# EAGLE board Keyboard (EAGLE 9.2.0)
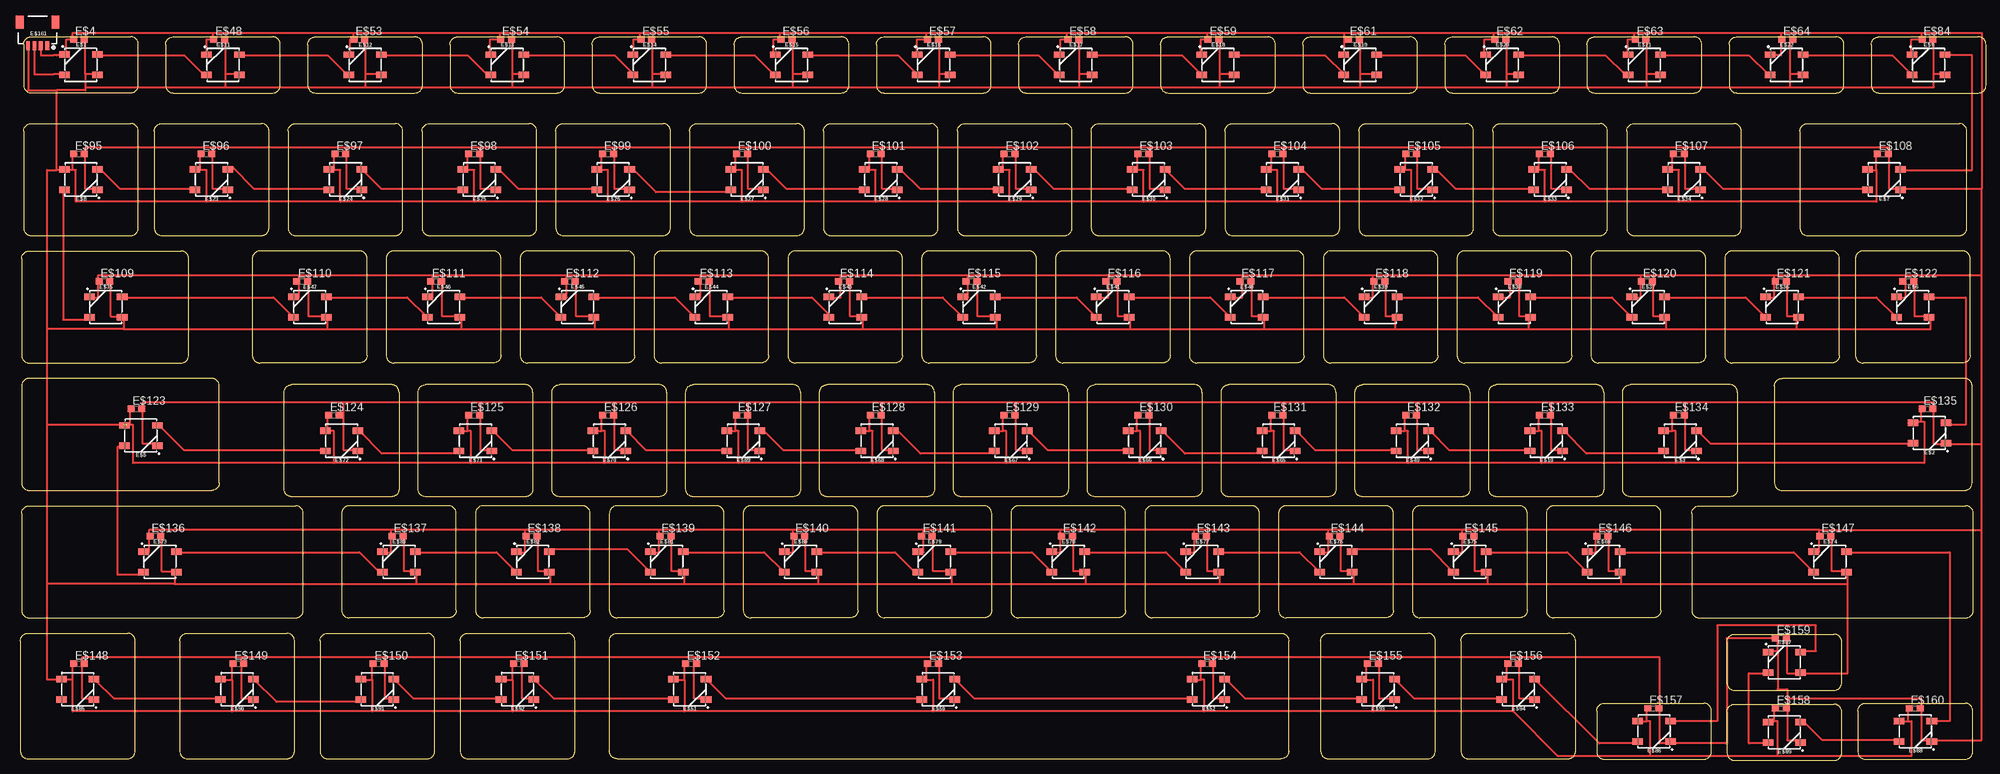
[diagram p0: board, top side]

No outline drawn. Coordinates in mm, seen from the top.
Copper layers (1*16): Top 0.035mm / dielectric 1.5mm / Bottom 0.035mm
Design rules "default": minimum track width 10mil, minimum drill 24mil, track to track 8mil, track to pad 8mil, pad to pad 8mil, via to via 8mil, smd to smd 8mil, copper to edge 40mil, drill to drill 8mil, minimum pad ring 10mil, minimum via ring 8mil, stop-mask expansion 4mil, vias tented up to drill 0mil, thermal gap 10mil
Milling: 677 lines

## Footprints (pad centres in the part's own frame; a part is rotated, then mirrored left to right if it is on the bottom)
WS2812B = smd 1.651 x 1: 1 2.577,-1.6; 2 2.577,1.6; 3 -2.577,1.6; 4 -2.577,-1.6
C0603 = smd 1.1 x 1: 1 -0.85,0; 2 0.85,0
1X04_1MM_RA = smd 0.6 x 1.35: 1 -1.5,0; 2 -0.5,0; 3 0.5,0; 4 1.5,0 | smd 1.2 x 2: NC1 2.8,-3.675; NC2 -2.8,-3.675

## Placement (x,y rotation side)
E$1  [WS2812B]  12.3,112 0 top
E$2  [WS2812B]  302.3,54.2 180 top
E$3  [WS2812B]  263.2,53 180 top
E$4  [C0603]  12,116 0 top
E$5  [WS2812B]  21.7,53.8 180 top
E$6  [WS2812B]  299.7,74 0 top
E$7  [WS2812B]  295.2,94 180 top
E$8  [WS2812B]  12.3,94 180 top
E$9  [WS2812B]  302.19,111.98 0 top
E$10  [WS2812B]  242.2,53 180 top
E$11  [WS2812B]  34.59,111.98 0 top
E$12  [WS2812B]  56.89,111.98 0 top
E$13  [WS2812B]  79.19,111.98 0 top
E$14  [WS2812B]  101.49,111.98 0 top
E$15  [WS2812B]  123.79,111.98 0 top
E$16  [WS2812B]  146.09,111.98 0 top
E$17  [WS2812B]  168.39,111.98 0 top
E$18  [WS2812B]  190.69,111.98 0 top
E$19  [WS2812B]  212.99,111.98 0 top
E$20  [WS2812B]  235.29,111.98 0 top
E$21  [WS2812B]  257.59,111.98 0 top
E$22  [WS2812B]  279.89,111.98 0 top
E$23  [WS2812B]  32.8,94 180 top
E$24  [WS2812B]  53.8,94 180 top
E$25  [WS2812B]  74.8,94 180 top
E$26  [WS2812B]  95.8,94 180 top
E$27  [WS2812B]  116.8,94 180 top
E$28  [WS2812B]  137.8,94 180 top
E$29  [WS2812B]  158.8,94 180 top
E$30  [WS2812B]  179.8,94 180 top
E$31  [WS2812B]  200.8,94 180 top
E$32  [WS2812B]  221.8,94 180 top
E$33  [WS2812B]  242.8,94 180 top
E$34  [WS2812B]  263.8,94 180 top
E$35  [WS2812B]  16.2,74 0 top
E$36  [WS2812B]  279.2,74 0 top
E$37  [WS2812B]  258.2,74 0 top
E$38  [WS2812B]  237.2,74 0 top
E$39  [WS2812B]  216.2,74 0 top
E$40  [WS2812B]  195.2,74 0 top
E$41  [WS2812B]  174.2,74 0 top
E$42  [WS2812B]  153.2,74 0 top
E$43  [WS2812B]  132.2,74 0 top
E$44  [WS2812B]  111.2,74 0 top
E$45  [WS2812B]  90.2,74 0 top
E$46  [WS2812B]  69.2,74 0 top
E$47  [WS2812B]  48.2,74 0 top
E$48  [C0603]  34,116 0 top
E$49  [WS2812B]  221.2,53 180 top
E$50  [WS2812B]  146.8,14 180 top
E$51  [WS2812B]  107.8,14 180 top
E$52  [WS2812B]  189.2,14 180 top
E$53  [C0603]  56,116 0 top
E$54  [C0603]  79,116 0 top
E$55  [C0603]  101,116 0 top
E$56  [C0603]  123,116 0 top
E$57  [C0603]  146,116 0 top
E$58  [C0603]  168,116 0 top
E$59  [C0603]  190,116 0 top
E$60  [WS2812B]  251.2,34 0 top
E$61  [C0603]  212,116 0 top
E$62  [C0603]  235,116 0 top
E$63  [C0603]  257,116 0 top
E$64  [C0603]  280,116 0 top
E$65  [WS2812B]  200.2,53 180 top
E$66  [WS2812B]  179.2,53 180 top
E$67  [WS2812B]  158.2,53 180 top
E$68  [WS2812B]  137.2,53 180 top
E$69  [WS2812B]  116.2,53 180 top
E$70  [WS2812B]  95.2,53 180 top
E$71  [WS2812B]  74.2,53 180 top
E$72  [WS2812B]  53.2,53 180 top
E$73  [WS2812B]  24.7,34 0 top
E$74  [WS2812B]  286.7,34 0 top
E$75  [WS2812B]  230.2,34 0 top
E$76  [WS2812B]  209.2,34 0 top
E$77  [WS2812B]  188.2,34 0 top
E$78  [WS2812B]  167.2,34 0 top
E$79  [WS2812B]  146.2,34 0 top
E$80  [WS2812B]  125.2,34 0 top
E$81  [WS2812B]  104.2,34 0 top
E$82  [WS2812B]  83.2,34 0 top
E$83  [WS2812B]  62.2,34 0 top
E$84  [C0603]  302,116 0 top
E$85  [WS2812B]  11.8,14 180 top
E$86  [WS2812B]  259.1,7.4 180 top
E$87  [WS2812B]  279.55,18.24 0 top
E$88  [WS2812B]  300.1,7.4 180 top
E$89  [WS2812B]  279.55,7.24 180 top
E$90  [WS2812B]  36.8,14 180 top
E$91  [WS2812B]  58.8,14 180 top
E$92  [WS2812B]  80.8,14 180 top
E$93  [WS2812B]  215.8,14 180 top
E$94  [WS2812B]  237.8,14 180 top
E$95  [C0603]  12,98 0 top
E$96  [C0603]  32,98 0 top
E$97  [C0603]  53,98 0 top
E$98  [C0603]  74,98 0 top
E$99  [C0603]  95,98 0 top
E$100  [C0603]  116,98 0 top
E$101  [C0603]  137,98 0 top
E$102  [C0603]  158,98 0 top
E$103  [C0603]  179,98 0 top
E$104  [C0603]  200,98 0 top
E$105  [C0603]  221,98 0 top
E$106  [C0603]  242,98 0 top
E$107  [C0603]  263,98 0 top
E$108  [C0603]  295,98 0 top
E$109  [C0603]  16,78 0 top
E$110  [C0603]  47,78 0 top
E$111  [C0603]  68,78 0 top
E$112  [C0603]  89,78 0 top
E$113  [C0603]  110,78 0 top
E$114  [C0603]  132,78 0 top
E$115  [C0603]  152,78 0 top
E$116  [C0603]  174,78 0 top
E$117  [C0603]  195,78 0 top
E$118  [C0603]  216,78 0 top
E$119  [C0603]  237,78 0 top
E$120  [C0603]  258,78 0 top
E$121  [C0603]  279,78 0 top
E$122  [C0603]  299,78 0 top
E$123  [C0603]  21,58 0 top
E$124  [C0603]  52,57 0 top
E$125  [C0603]  74,57 0 top
E$126  [C0603]  95,57 0 top
E$127  [C0603]  116,57 0 top
E$128  [C0603]  137,57 0 top
E$129  [C0603]  158,57 0 top
E$130  [C0603]  179,57 0 top
E$131  [C0603]  200,57 0 top
E$132  [C0603]  221,57 0 top
E$133  [C0603]  242,57 0 top
E$134  [C0603]  263,57 0 top
E$135  [C0603]  302,58 0 top
E$136  [C0603]  24,38 0 top
E$137  [C0603]  62,38 0 top
E$138  [C0603]  83,38 0 top
E$139  [C0603]  104,38 0 top
E$140  [C0603]  125,38 0 top
E$141  [C0603]  145,38 0 top
E$142  [C0603]  167,38 0 top
E$143  [C0603]  188,38 0 top
E$144  [C0603]  209,38 0 top
E$145  [C0603]  230,38 0 top
E$146  [C0603]  251,38 0 top
E$147  [C0603]  286,38 0 top
E$148  [C0603]  12,18 0 top
E$149  [C0603]  37,18 0 top
E$150  [C0603]  59,18 0 top
E$151  [C0603]  81,18 0 top
E$152  [C0603]  108,18 0 top
E$153  [C0603]  146,18 0 top
E$154  [C0603]  189,18 0 top
E$155  [C0603]  215,18 0 top
E$156  [C0603]  237,18 0 top
E$157  [C0603]  259,11 0 top
E$158  [C0603]  279,11 0 top
E$159  [C0603]  279,22 0 top
E$160  [C0603]  300,11 0 top
E$161  [1X04_1MM_RA]  5.5,115 180 top

## Library data of the parts
E$1-E$3 E$5-E$47 E$49-E$52 E$60 E$65-E$83 E$85-E$94 = SparkFun-LED
E$4 E$48 E$53-E$59 E$61-E$64 E$84 E$95-E$160 = eagle-ltspice
E$161 = SparkFun-Connectors

## Nets
S$236: E$161.3
VDD: E$161.4
VSS: E$161.2

## Tracks (layer width: path | path; a pad name or v marks a point on that pad's centre or on a via)
S$1
  Top 0.305: 15,113.5 28.5,113.5 31.5,110.5
S$2
  Top 0.305: 37.5,113.5 51,113.5 54,110.5
S$3
  Top 0.305: 60,113.5 73,113.5 76.5,110
S$4
  Top 0.305: 82,113.5 96,113.5 99,110.5
S$5
  Top 0.305: 104,113.5 118,113.5 121,110.5
S$6
  Top 0.305: 126.5,113.5 140.5,113.5 143.5,110.5
S$7
  Top 0.305: 148.5,113.5 162.5,113.5 165.5,110.5
S$8
  Top 0.305: 171,113.5 185,113.5 188,110.5
S$9
  Top 0.305: 193,113.5 207.5,113.5 210.5,110.5
S$10
  Top 0.305: 215.5,113.5 229.5,113.5 232.5,110.5
S$11
  Top 0.305: 238,113.5 251.5,113.5 254.5,110.5
S$12
  Top 0.305: 260,113.5 274,113.5 277,110.5
S$13
  Top 0.305: 282.5,113.5 296.5,113.5 299.5,110.5
S$14
  Top 0.305: 298,95.5 309,95.5 309,113.5 305,113.5
S$15
  Top 0.305: 292.5,92.5 270,92.5 267,95.5
S$16
  Top 0.305: 261.5,92.5 249,92.5 246,95.5
S$17
  Top 0.305: 240,92.5 228,92.5 225,95.5
S$18
  Top 0.305: 219,92.5 207,92.5 204,95.5
S$19
  Top 0.305: 198.5,92.5 185.5,92.5 182.5,95.5
S$20
  Top 0.305: 177.5,92.5 165,92.5 162,95.5
S$21
  Top 0.305: 156,92.5 144,92.5 141,95.5
S$22
  Top 0.305: 135,92.5 123,92.5 119.5,96
S$23
  Top 0.305: 114,92 102.5,92 98.5,96
S$24
  Top 0.305: 93,92.5 81,92.5 78,95.5
S$25
  Top 0.305: 72,92.5 59.5,92.5 56.5,95.5
S$26
  Top 0.305: 51.5,92.5 39.5,92.5 36,96
S$27
  Top 0.305: 30,92.5 18.5,92.5 15.5,95.5
S$28
  Top 0.305: 9.5,92.5 9.5,72 13.5,72
S$29
  Top 0.305: 19,75.5 42.5,75.5 45.5,72.5
S$30
  Top 0.305: 51,75.5 63.5,75.5 66.5,72.5
S$31
  Top 0.305: 71.5,75.5 84.5,75.5 87.5,72.5
S$32
  Top 0.305: 93,75.5 105.5,75.5 108.5,72.5
S$33
  Top 0.305: 114,75.5 127,75.5 130,72.5
S$34
  Top 0.305: 135,75.5 147.5,75.5 150.5,72.5
S$35
  Top 0.305: 155.5,75.5 168.5,75.5 171.5,72.5
S$36
  Top 0.305: 176.5,75.5 189.5,75.5 192.5,72.5
S$37
  Top 0.305: 197.5,75.5 210.5,75.5 213.5,72.5
S$38
  Top 0.305: 219,75.5 231.5,75.5 234.5,72.5
S$39
  Top 0.305: 240,75.5 252.5,75.5 255.5,72.5
S$40
  Top 0.305: 261,75.5 273.5,75.5 276.5,72.5
S$41
  Top 0.305: 282,75.5 294,75.5 297,72.5
S$42
  Top 0.305: 302.5,75.5 308,75.5 308,55.5 305,55.5
S$43
  Top 0.305: 299.5,52.5 268,52.5 266,54.5
S$44
  Top 0.305: 261,51 248.5,51 245,54.5
S$45
  Top 0.305: 239.5,51.5 227,51.5 224,54.5
S$46
  Top 0.305: 218.5,51.5 206,51.5 203,54.5
S$47
  Top 0.305: 198,51 185.5,51 182,54.5
S$48
  Top 0.305: 176.5,51.5 164,51.5 161,54.5
S$49
  Top 0.305: 156,51 144,51 140.5,54.5
S$50
  Top 0.305: 134.5,51.5 122.5,51.5 119.5,54.5
S$51
  Top 0.305: 113.5,51.5 101,51.5 98,54.5
S$52
  Top 0.305: 92.5,51.5 80,51.5 77,54.5
S$53
  Top 0.305: 71.5,51 59.5,51 56,54.5
S$54
  Top 0.305: 50.5,51.5 28.5,51.5 24.5,55.5
S$55
  Top 0.305: 19,52 18,52 18,32 22.5,32
S$56
  Top 0.305: 27.5,35.5 56,35.5 59,32.5
S$57
  Top 0.305: 65,35.5 77.5,35.5 80.5,32.5
S$58
  Top 0.305: 86,36 98,36 101.5,32.5
S$59
  Top 0.305: 107,35.5 119.5,35.5 122.5,32.5
S$60
  Top 0.305: 128,35.5 140,35.5 143.5,32
S$61
  Top 0.305: 149,35.5 161.5,35.5 164.5,32.5
S$62
  Top 0.305: 170,35.5 182.5,35.5 185.5,32.5
S$63
  Top 0.305: 190.5,35.5 203.5,35.5 206.5,32.5
S$64
  Top 0.305: 212,36 224,36 227.5,32.5
S$65
  Top 0.305: 232.5,35.5 245.5,35.5 248.5,32.5
S$66
  Top 0.305: 254,35.5 281,35.5 284,32.5
S$67
  Top 0.305: 289.5,35.5 305.5,35.5 305.5,9 303,9
S$68
  Top 0.305: 297.5,6 285.5,6 282.5,9
S$69
  Top 0.305: 277,5.5 274,5.5 274,16.5 277,16.5
S$70
  Top 0.305: 282,20 284.5,20 284.5,24 269,24 269,9 262,9
S$71
  Top 0.305: 256.5,5.5 250.5,5.5 240.5,15.5
S$72
  Top 0.305: 235.5,12.5 221.5,12.5 218.5,15.5
S$73
  Top 0.305: 213,12.5 195,12.5 192,15.5
S$74
  Top 0.305: 186.5,12.5 152.5,12.5 149.5,15.5
S$75
  Top 0.305: 144,12.5 113.5,12.5 110.5,15.5
S$76
  Top 0.305: 105,12.5 86.5,12.5 83.5,15.5
S$77
  Top 0.305: 78.5,12.5 64.5,12.5 61.5,15.5
S$78
  Top 0.305: 56,12 43,12 39.5,15.5
S$79
  Top 0.305: 34.5,12.5 17.5,12.5 14.5,15.5
S$236
  Top 0.305: 10,110.5 9,110.5 8,110.5 5,110.5 E$161.3
VDD  (1 unrouted)
  Top 0.305: 213.5,15.5 214,15.5 | 214,15.5 214,18 | 214,15.5 215,15.5 215,10.5 | 186.5,15.5 188,15.5 | 188,15.5 188,18.5 | 188,15.5 188.5,15.5 188.5,10.5 | 144,15.5 145,15.5 | 145,15.5 145,18 | 145,15.5 146,15.5 146,10.5 | 105.5,15.5 107,15.5 | 107,15.5 107,18 | 78,15.5 80,15.5 | 80,15.5 80,18 | 56,15.5 58,15.5 | 58,15.5 58,18 | 34,15.5 36,15.5 | 36,15.5 36,18 | 297.5,9 299,9 | 299,9 299,11 | 299,9 299.5,9 299.5,3.5 278.5,3.5 | 277,9 278,9 | 278,9 278,11 | 278,9 278.5,9 278.5,3.5 | 256.5,9 258,9 | 258,9 258,11 | 258,9 258.5,9 258.5,3.5 | 278.5,3.5 258.5,3.5 | 235,15.5 236,15.5 | 236,15.5 236,18 | 236,15.5 237,15.5 237,10.5 | 258.5,3.5 244,3.5 237,10.5 | 11,15.5 11,18 | 11,15.5 11,10.5 36,10.5 | 280,22 280,16.5 289.5,16.5 289.5,30.5 | 25,38 25,32.5 27,32.5 27,30.5 | 63,38 63,32.5 65,32.5 65,30.5 | 27,30.5 65,30.5 | 84,38 84,32.5 86,32.5 86,30.5 | 65,30.5 86,30.5 | 105,38 105,32.5 107,32.5 107,30.5 | 86,30.5 107,30.5 | 126,38 126,32.5 128,32.5 128,30.5 | 107,30.5 128,30.5 | 146,38 146,32.5 149,32.5 149,30.5 | 128,30.5 149,30.5 | 168,38 168,32.5 170,32.5 170,30.5 | 149,30.5 170,30.5 | 189,38 189,32.5 191,32.5 191,30.5 | 170,30.5 191,30.5 | 210,38 210,32.5 212,32.5 212,30.5 | 191,30.5 212,30.5 | 231,38 231,32.5 233,32.5 233,30.5 | 212,30.5 233,30.5 | 252,38 252,32.5 254,32.5 254,30.5 | 233,30.5 254,30.5 | 287,38 287,32.5 289.5,32.5 289.5,30.5 | 254,30.5 289.5,30.5 | 300,56 301,56 | 301,56 301,58 | 301,56 301.5,56 301.5,49.5 262.5,49.5 | 262.5,49.5 262.5,54.5 262,54.5 | 260.5,54.5 262,54.5 | 262,54.5 262,57 | 262.5,49.5 241.5,49.5 | 241.5,49.5 241.5,54.5 241,54.5 | 239.5,54.5 241,54.5 | 241,54.5 241,57 | 241.5,49.5 220.5,49.5 | 220.5,49.5 220.5,54.5 220,54.5 | 218.5,54.5 220,54.5 | 220,54.5 220,57 | 220.5,49.5 199.5,49.5
  Top 0.305: 199.5,49.5 199.5,54.5 199,54.5 | 197.5,54.5 199,54.5 | 199,54.5 199,57 | 199.5,49.5 178.5,49.5 | 178.5,49.5 178.5,54.5 178,54.5 | 176.5,54.5 178,54.5 | 178,54.5 178,57 | 178.5,49.5 157.5,49.5 | 157.5,49.5 157.5,54.5 157,54.5 | 155.5,54.5 157,54.5 | 157,54.5 157,57 | 157.5,49.5 136.5,49.5 | 136.5,49.5 136.5,54.5 136,54.5 | 134.5,54.5 136,54.5 | 136,54.5 136,57 | 136.5,49.5 115.5,49.5 | 115.5,49.5 115.5,54.5 115,54.5 | 113.5,54.5 115,54.5 | 115,54.5 115,57 | 115.5,49.5 94.5,49.5 | 94.5,49.5 94.5,54.5 94,54.5 | 92.5,54.5 94,54.5 | 94,54.5 94,57 | 94.5,49.5 73.5,49.5 | 73.5,49.5 73.5,54.5 73,54.5 | 71.5,54.5 73,54.5 | 73,54.5 73,57 | 73.5,49.5 52,49.5 | 52,49.5 52,54.5 51,54.5 | 50.5,54.5 51,54.5 | 51,54.5 51,57 | 52,49.5 20.5,49.5 20.5,55.5 20,55.5 | 19,55.5 20,55.5 | 20,55.5 20,58 | 17,78 17,72.5 19,72.5 19,70.5 | 19,70.5 51,70.5 | 48,78 48,72.5 51,72.5 51,70.5 | 69,78 69,72.5 72,72.5 72,70.5 | 51,70.5 72,70.5 | 90,78 90,72.5 93,72.5 93,70.5 | 72,70.5 93,70.5 | 111,78 111,72.5 114,72.5 114,70.5 | 93,70.5 114,70.5 | 133,78 133,72.5 135,72.5 135,70.5 | 114,70.5 135,70.5 | 153,78 153,72.5 156,72.5 156,70.5 | 135,70.5 156,70.5 | 175,78 175,72.5 177,72.5 177,70.5 | 156,70.5 177,70.5 | 196,78.5 196,72.5 198,72.5 198,70.5 | 177,70.5 198,70.5 | 217,78 217,72.5 218.5,72.5 218.5,70.5 | 198,70.5 218.5,70.5 | 240,72.5 239.5,72.5 | 239.5,72.5 238,72.5 238,78 | 218.5,70.5 239.5,70.5 | 239.5,70.5 239.5,72.5 | 259,78 259,72.5 261,72.5 261,70.5 | 239.5,70.5 261,70.5 | 280,78 280,72.5 281.5,72.5 281.5,70.5 | 261,70.5 281.5,70.5 | 300,78 300,72.5 302.5,72.5 302.5,70.5 281.5,70.5 | 19,70.5 7,70.5 | 7,70.5 7,95.5 8.5,95.5 | 292.5,95.5 294,95.5 | 294,95.5 294,98 | 294,95.5 294,90.5 263,90.5 | 263,90.5 263,95.5 262,95.5
  Top 0.305: 261,95.5 262,95.5 | 262,95.5 262,98 | 263,90.5 242,90.5 | 242,90.5 242,95.5 241,95.5 | 240.5,95.5 241,95.5 | 241,95.5 241,98 | 242,90.5 221,90.5 | 221,90.5 221,95.5 220,95.5 | 220,98 220,95.5 | 220,95.5 219,95.5 | 221,90.5 200,90.5 | 200,90.5 200,95.5 199,95.5 | 199,98 199,95.5 | 199,95.5 198,95.5 | 200,90.5 179,90.5 | 179,90.5 179,95.5 178,95.5 | 178,98 178,95.5 | 178,95.5 177,95.5 | 179,90.5 158,90.5 | 158,90.5 158,95.5 157,95.5 | 156,95.5 157,95.5 | 157,95.5 157,98 | 158,90.5 137,90.5 | 137,90.5 137,95.5 136,95.5 | 135.5,95.5 136,95.5 | 136,95.5 136,98 | 137,90.5 116,90.5 | 116,90.5 116,95.5 115,95.5 | 114,95.5 115,95.5 | 115,95.5 115,98 | 116,90.5 95,90.5 | 95,90.5 95,95.5 94,95.5 | 93,95.5 94,95.5 | 94,95.5 94,98 | 95,90.5 74,90.5 | 74,90.5 74,95.5 73,95.5 | 72.5,95.5 73,95.5 | 73,95.5 73,98 | 74,90.5 53,90.5 | 53,90.5 53,95.5 52,95.5 | 51,95.5 52,95.5 | 52,95.5 52,98 | 53,90.5 32,90.5 | 32,90.5 32,95.5 31,95.5 | 30,95.5 31,95.5 | 31,95.5 31,98 | 32,90.5 11.5,90.5 11.5,95.5 11,95.5 | 11,95.5 11,98 | 15,110.5 13,110.5 | 13,110.5 13,116 | 13,110.5 13,108.5 | 13,108.5 13,108 8.5,108 | 37.5,110.5 35,110.5 | 35,110.5 35,116 | 13,108.5 35,108.5 | 35,108.5 35,110.5 | 59.5,110.5 57,110.5 | 57,110.5 57,116 | 35,108.5 57,108.5 | 57,108.5 57,110.5 | 82,110.5 80,110.5 | 80,110.5 80,116 | 57,108.5 80,108.5 | 80,108.5 80,110.5 | 104,110.5 102,110.5 | 102,110.5 102,116 | 80,108.5 102,108.5 | 102,108.5 102,110.5 | 126.5,110.5 124,110.5 | 124,110.5 124,116 | 102,108.5 124,108.5 | 124,108.5 124,110.5 | 148.5,110.5 147,110.5 | 147,110.5 147,116 | 124,108.5 147,108.5 | 147,108.5 147,110.5 | 171,110.5 169,110.5 | 169,110.5 169,116 | 147,108.5 169,108.5 | 169,108.5 169,110.5 | 193.5,110.5 191,110.5 | 191,110.5 191,116 | 169,108.5 191,108.5
  Top 0.305: 191,108.5 191,110.5 | 215.5,110.5 213,110.5 | 213,110.5 213,116 | 191,108.5 213,108.5 | 213,108.5 213,110.5 | 238,110.5 236,110.5 | 236,110.5 236,116 | 213,108.5 236,108.5 | 236,108.5 236,110.5 | 260,110.5 258,110.5 | 258,110.5 258,116 | 236,108.5 258,108.5 | 258,108.5 258,110.5 | 282.5,110.5 280.5,110.5 | 280.5,110.5 280.5,116 | 258,108.5 280.5,108.5 | 280.5,108.5 280.5,110.5 | 305,110.5 303,110.5 | 303,110.5 303,115.5 | 280.5,108.5 303,108.5 303,110.5 | 11,95.5 8.5,95.5 | 8.5,95.5 8.5,108 | 19.5,55.5 7,55.5 | 7,55.5 7,70.5 | 27,30.5 7,30.5 | 7,30.5 7,55.5 | 11,15.5 7,15.5 7,30.5 | E$161.4 4,108 8.5,108 | 237,10.5 215,10.5 | 215,10.5 188.5,10.5 | 188.5,10.5 146,10.5 | 146,10.5 107,10.5 | 107,10.5 80,10.5 | 80,10.5 58,10.5 | 58,10.5 36,10.5 | 36,15.5 36,10.5 | 58,15.5 58,10.5 | 80,15.5 80,10.5 | 107,15.5 107,10.5
VSS
  Top 0.305: 240,12.5 238,12.5 238,19 | 218,12.5 216,12.5 216,19 | 192,12.5 190,12.5 190,19 | 149,12.5 147,12.5 147,19 | 110.5,12.5 108.5,12.5 108.5,19 | 83.5,12.5 81.5,12.5 81.5,19 | 62,12.5 60,12.5 60,19 | 39.5,12.5 37.5,12.5 37.5,19 | 277,20 278.5,20 | 278.5,20 278.5,22 270.5,22 270.5,5.5 260,5.5 260,19 238,19 | 278.5,20 278.5,14 280,14 280,12.5 | 249,35.5 250,35.5 250,39 | 228,35.5 229,35.5 229,39 | 186,35.5 187,35.5 187,39 | 143.5,35.5 144.5,35.5 144.5,39 | 123,35.5 124,35.5 124,39 | 102,35.5 103,35.5 103,39 | 60,35.5 61,35.5 61,39 | 284,35.5 285,35.5 285,39 | 45,75.5 46.5,75.5 46.5,79 | 66,75.5 67.5,75.5 67.5,79 | 87,75.5 88.5,75.5 88.5,79 | 108,75.5 109.5,75.5 109.5,79 | 130,75.5 131.5,75.5 131.5,79 | 150,75.5 151.5,75.5 151.5,79 | 172,75.5 173.5,75.5 173.5,79 | 193,75.5 194.5,75.5 194.5,79 | 213.5,75.5 215,75.5 215,79 | 276.5,75.5 278,75.5 278,79 | 13.5,75.5 15,75.5 15,79 46.5,79 | 297,75.5 298.5,75.5 298.5,79 | 46.5,79 67.5,79 | 67.5,79 88.5,79 | 88.5,79 109.5,79 | 109.5,79 131.5,79 | 131.5,79 151.5,79 | 151.5,79 173.5,79 | 173.5,79 194.5,79 | 194.5,79 215,79 | 215,79 236.5,79 | 236.5,79 257,79 | 257,79 278,79 | 278,79 298.5,79 | 266,92.5 264,92.5 264,99 | 32,113.5 32,116 33,116 33,117 | 33,117 11,117 11,116 10,116 10,113.5 8.5,113.5 8,113.5 6,113.5 E$161.2 | 54.5,113.5 54.5,116 55,116 55,117 | 33,117 55,117 | 76.5,113.5 76.5,116 78,116 78,117 | 55,117 78,117 | 99,113.5 99,116 100,116 100,117 | 78,117 100,117 | 121,113.5 121,116 122,116 122,117 | 100,117 122,117 | 143.5,114 143.5,116 145,116 145,117 | 122,117 145,117 | 166,113.5 166,116 167,116 | 167,116 167.5,116 | 145,117 167,117 | 167,116 167,117 | 167,117 189,117 | 188,113.5 188,116 189,116 189,117 | 210.5,113.5 210.5,116
  Top 0.305: 210.5,116 211,116 | 189,117 210.5,117 | 210.5,116 210.5,117 | 232.5,113.5 232.5,116 234,116 234,117 | 210.5,117 234,117 | 255,113.5 255,116 256,116 | 256,116 256.5,116 | 234,117 256,117 | 256,116 256,117 | 256,117 279,117 | 279,117 279,113.5 277.5,113.5 | 299.5,113.5 299.5,116 301,116 301,117 | 279,117 301,117 | 301,117 310.5,117 310.5,92.5 | 264,99 296,99 296,92.5 310.5,92.5 | 264,99 243,99 | 243,99 222,99 | 222,99 201,99 | 201,99 180,99 | 180,99 159,99 | 159,99 138,99 | 138,99 117,99 | 117,99 96,99 | 96,99 75,99 | 75,99 54,99 | 54,99 33,99 | 33,99 13,99 13,92.5 15,92.5 | 245,92.5 243,92.5 243,99 | 224,92.5 222,92.5 222,99 | 203,92.5 201,92.5 201,99 | 182,92.5 180,92.5 180,99 | 161,92.5 159,92.5 159,99 | 140,92.5 138,92.5 138,99 | 119,92.5 117,92.5 117,99 | 98,92.5 96,92.5 96,99 | 77,92.5 75,92.5 75,99 | 56,92.5 54,92.5 54,99 | 35,92.5 33,92.5 33,99 | 310.5,52.5 303,52.5 303,59 264,59 | 310.5,52.5 310.5,79 | 310.5,79 310.5,92.5 | 266,51.5 264,51.5 264,59 | 245,51.5 243,51.5 243,59 | 264,59 243,59 | 224,51.5 222,51.5 222,59 | 243,59 222,59 | 203,51.5 201,51.5 201,59 | 222,59 201,59 | 182,51.5 180,51.5 180,59 | 201,59 180,59 | 161,51.5 159,51.5 159,59 | 180,59 159,59 | 140,51.5 138,51.5 138,59 | 159,59 138,59 | 119,51.5 117,51.5 117,59 | 138,59 117,59 | 98,51.5 96,51.5 96,59 | 117,59 96,59 | 77,51.5 75,51.5 75,59 | 96,59 75,59 | 55.5,51.5 53.5,51.5 53.5,59 | 75,59 53.5,59 | 24,52.5 22,52.5 22,59 53.5,59 | 298.5,79 310.5,79 | 255.5,75.5 257,75.5 257,79 | 235,75.5 236.5,75.5 236.5,79 | 285,39 310.5,39 | 310.5,39 310.5,52.5 | 22,35.5 23,35.5 23,39 61,39 | 285,39 250,39 | 250,39 229,39 | 229,39 208,39 | 208,39 187,39 | 187,39 166,39 | 166,39 144.5,39 | 144.5,39 124,39 | 124,39 103,39 | 103,39 82,39 | 82,39 61,39
  Top 0.305: 80.5,35.5 82,35.5 82,39 | 164.5,35.5 166,35.5 166,39 | 206.5,35.5 208,35.5 208,39 | 310.5,39 310.5,6 301,6 301,12.5 280,12.5 | 280,12.5 280,6 281.5,6 | 14.5,12.5 12.5,12.5 12.5,19 37.5,19 | 238,19 216,19 | 216,19 190,19 | 190,19 147,19 | 147,19 108.5,19 | 108.5,19 81.5,19 | 81.5,19 60,19 | 60,19 37.5,19